# EAGLE board routetest3 (EAGLE 6.0)
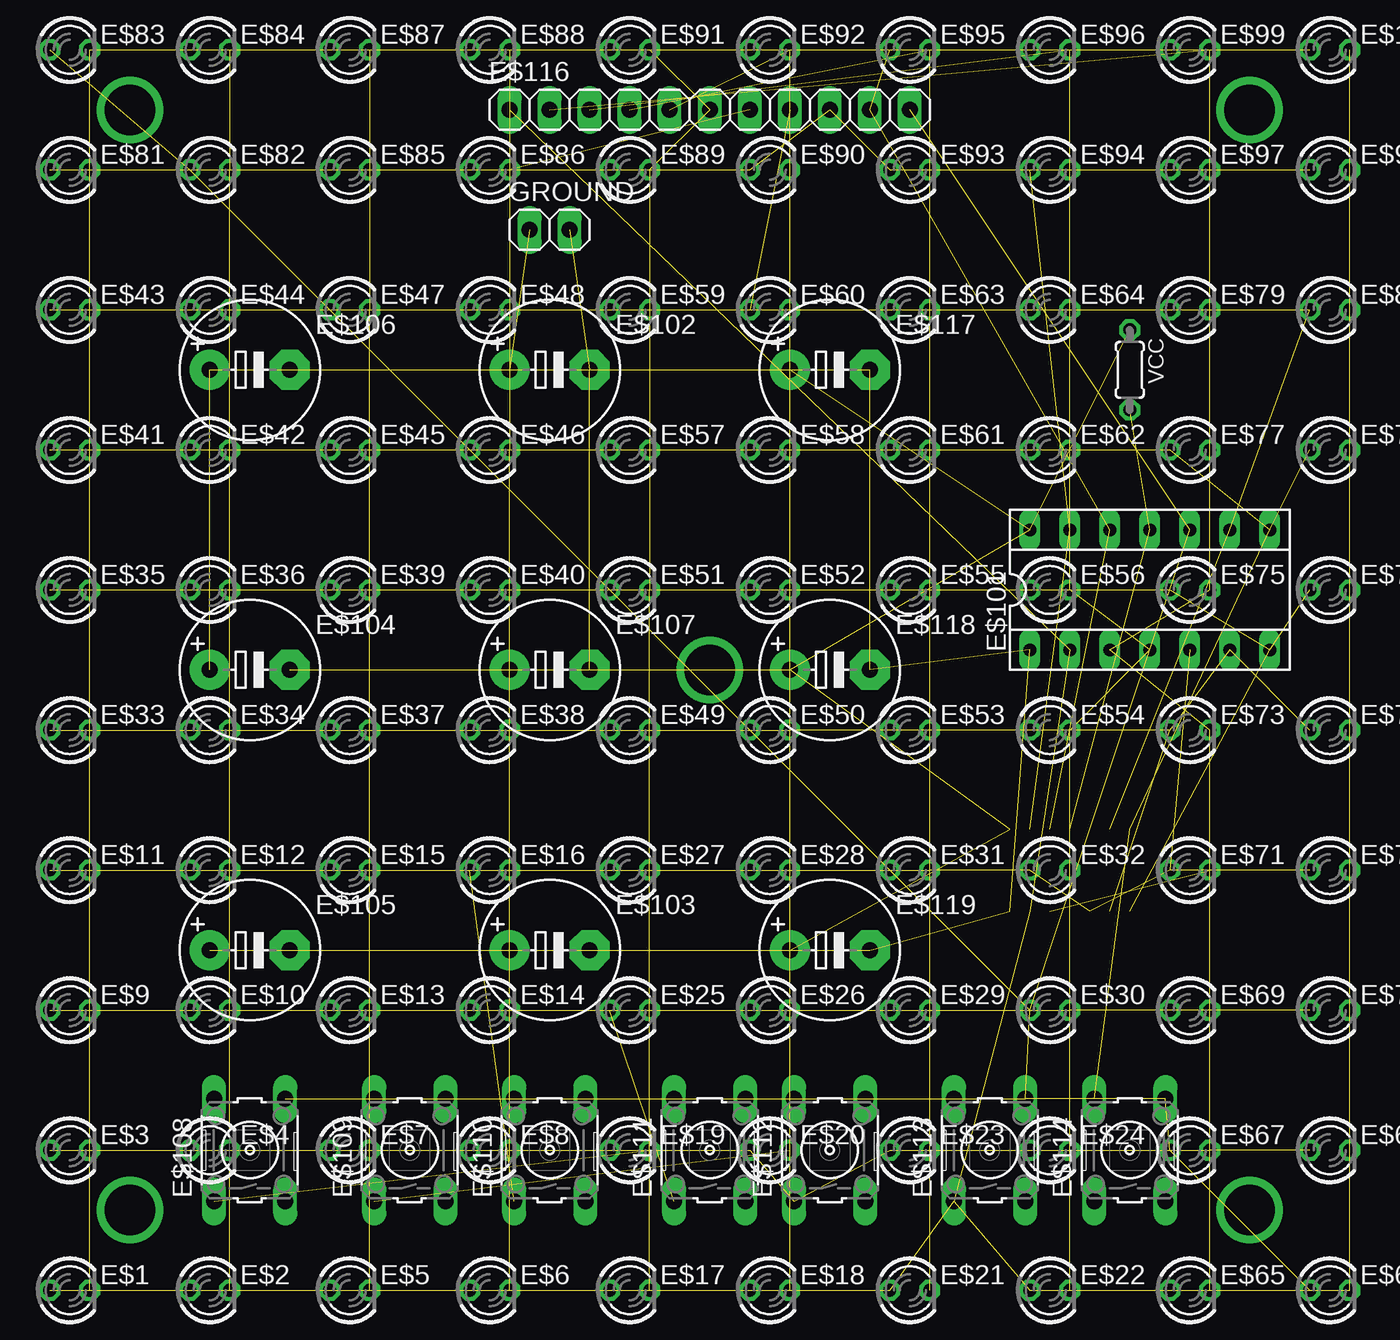
[diagram p0: board, top side]
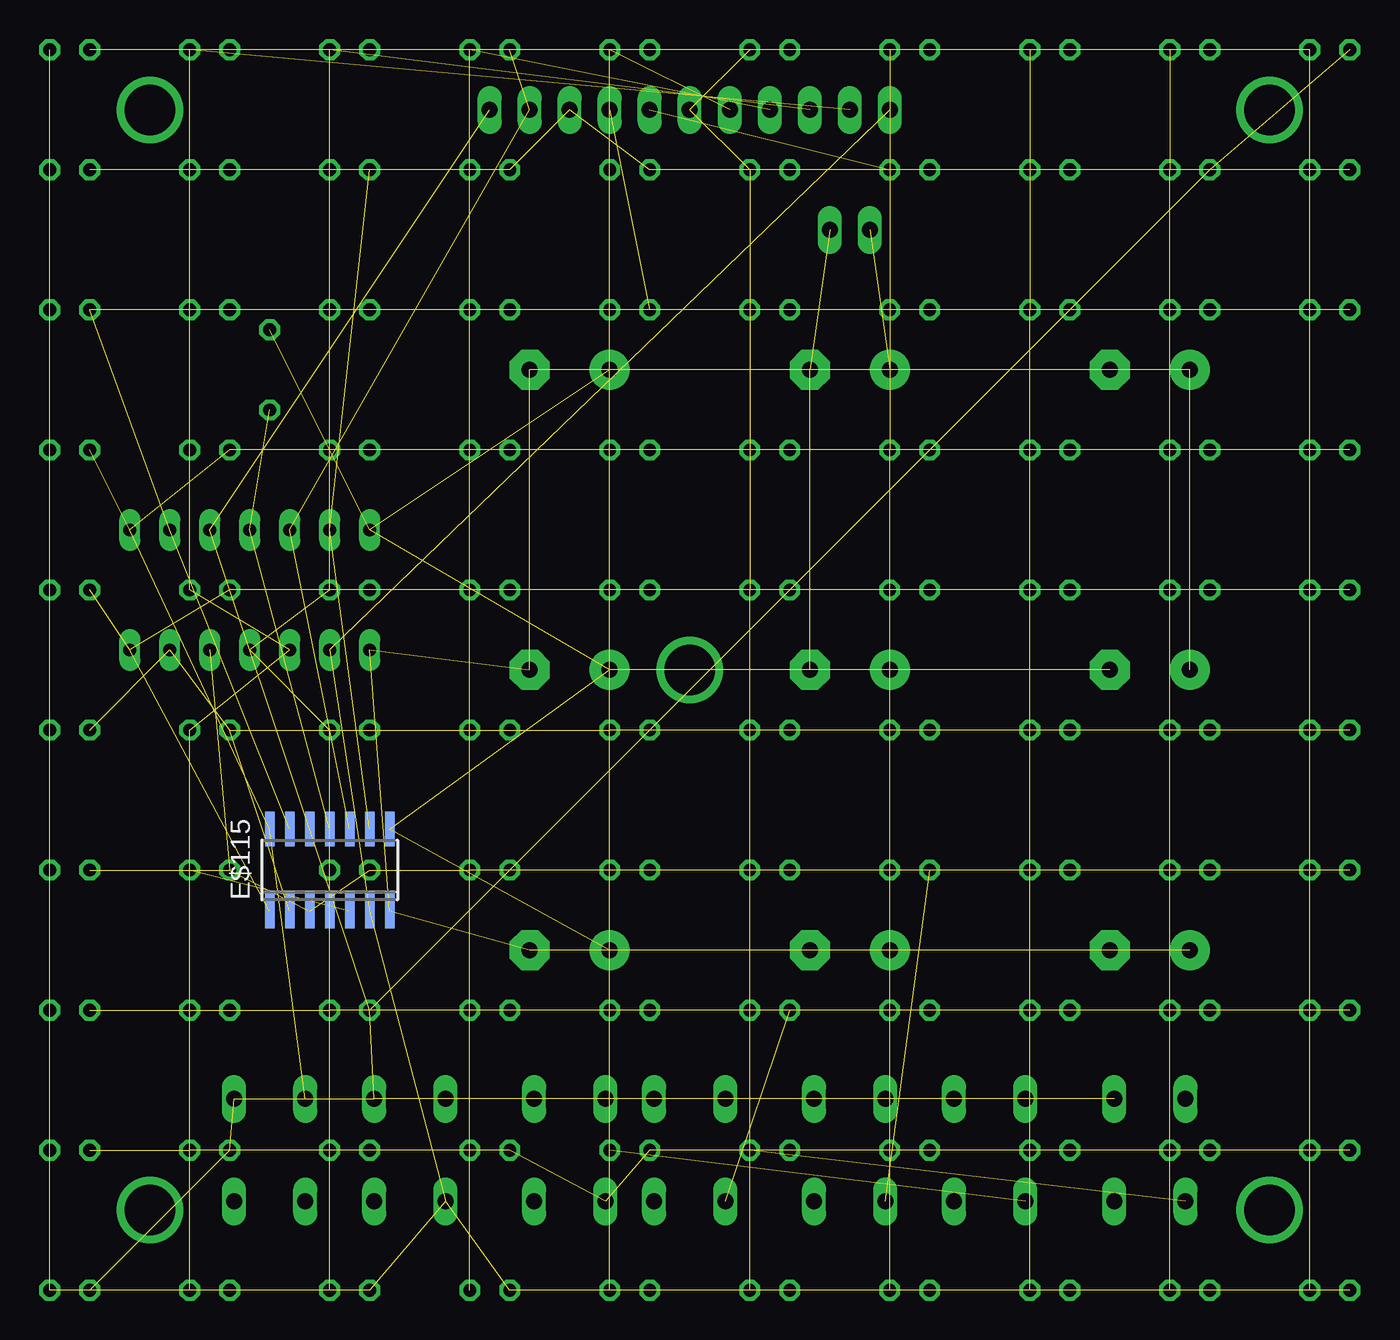
[diagram p1: board, bottom side, seen from below]

No outline drawn. Coordinates in mm, seen from the top.
Copper layers (1*16): Top 0.035mm / dielectric 1.5mm / Bottom 0.035mm
Design rules: minimum track width 20mil, minimum drill 24mil, track to track 15mil, track to pad 15mil, pad to pad 10mil, via to via 10mil, smd to smd 8mil, copper to edge 30mil, drill to drill 8mil, minimum pad ring 10mil, minimum via ring 8mil, stop-mask expansion 4mil, vias tented up to drill 0mil, thermal gap 10mil

## Footprints (pad centres in the part's own frame; a part is rotated, then mirrored left to right if it is on the bottom)
LED3MM = drill 0.813 octagon: A -1.27,0; K 1.27,0
SOCKET-14 = drill 0.813 long: 1 -7.62,-3.81; 2 -5.08,-3.81; 3 -2.54,-3.81; 4 0,-3.81; 5 2.54,-3.81; 6 5.08,-3.81; 7 7.62,-3.81; 8 7.62,3.81; 9 5.08,3.81; 10 2.54,3.81; 11 0,3.81; 12 -2.54,3.81; 13 -5.08,3.81; 14 -7.62,3.81
E5-8,5 = drill 1.016 pad 2.54: + -2.54,0 | drill 1.016 pad 2.54 octagon: - 2.54,0
B3F-10XX = drill 1.016 long: 1 -3.251,2.261; 2 3.251,2.261; 3 -3.251,-2.261; 4 3.251,-2.261
SO14 = smd 0.6 x 2.2: 1 -3.81,-2.6; 2 -2.54,-2.6; 3 -1.27,-2.6; 4 0,-2.6; 5 1.27,-2.6; 6 2.54,-2.6; 7 3.81,-2.6; 8 3.81,2.6; 9 2.54,2.6; 10 1.27,2.6; 11 0,2.6; 12 -1.27,2.6; 13 -2.54,2.6; 14 -3.81,2.6
1X11 = drill 1.016 long: 1 -12.7,0; 2 -10.16,0; 3 -7.62,0; 4 -5.08,0; 5 -2.54,0; 6 0,0; 7 2.54,0; 8 5.08,0; 9 7.62,0; 10 10.16,0; 11 12.7,0
1X02 = drill 1.016 long: 1 -1.27,0; 2 1.27,0
0204/5 = drill 0.813 octagon: 1 -2.54,0; 2 2.54,0

## Placement (x,y rotation side)
E$1  [LED3MM]  2.54,2.54 0 top
E$2  [LED3MM]  11.43,2.54 0 top
E$3  [LED3MM]  2.54,11.43 0 top
E$4  [LED3MM]  11.43,11.43 0 top
E$5  [LED3MM]  20.32,2.54 0 top
E$6  [LED3MM]  29.21,2.54 0 top
E$7  [LED3MM]  20.32,11.43 0 top
E$8  [LED3MM]  29.21,11.43 0 top
E$9  [LED3MM]  2.54,20.32 0 top
E$10  [LED3MM]  11.43,20.32 0 top
E$11  [LED3MM]  2.54,29.21 0 top
E$12  [LED3MM]  11.43,29.21 0 top
E$13  [LED3MM]  20.32,20.32 0 top
E$14  [LED3MM]  29.21,20.32 0 top
E$15  [LED3MM]  20.32,29.21 0 top
E$16  [LED3MM]  29.21,29.21 0 top
E$17  [LED3MM]  38.1,2.54 0 top
E$18  [LED3MM]  46.99,2.54 0 top
E$19  [LED3MM]  38.1,11.43 0 top
E$20  [LED3MM]  46.99,11.43 0 top
E$21  [LED3MM]  55.88,2.54 0 top
E$22  [LED3MM]  64.77,2.54 0 top
E$23  [LED3MM]  55.88,11.43 0 top
E$24  [LED3MM]  64.77,11.43 0 top
E$25  [LED3MM]  38.1,20.32 0 top
E$26  [LED3MM]  46.99,20.32 0 top
E$27  [LED3MM]  38.1,29.21 0 top
E$28  [LED3MM]  46.99,29.21 0 top
E$29  [LED3MM]  55.88,20.32 0 top
E$30  [LED3MM]  64.77,20.32 0 top
E$31  [LED3MM]  55.88,29.21 0 top
E$32  [LED3MM]  64.77,29.21 0 top
E$33  [LED3MM]  2.54,38.1 0 top
E$34  [LED3MM]  11.43,38.1 0 top
E$35  [LED3MM]  2.54,46.99 0 top
E$36  [LED3MM]  11.43,46.99 0 top
E$37  [LED3MM]  20.32,38.1 0 top
E$38  [LED3MM]  29.21,38.1 0 top
E$39  [LED3MM]  20.32,46.99 0 top
E$40  [LED3MM]  29.21,46.99 0 top
E$41  [LED3MM]  2.54,55.88 0 top
E$42  [LED3MM]  11.43,55.88 0 top
E$43  [LED3MM]  2.54,64.77 0 top
E$44  [LED3MM]  11.43,64.77 0 top
E$45  [LED3MM]  20.32,55.88 0 top
E$46  [LED3MM]  29.21,55.88 0 top
E$47  [LED3MM]  20.32,64.77 0 top
E$48  [LED3MM]  29.21,64.77 0 top
E$49  [LED3MM]  38.1,38.1 0 top
E$50  [LED3MM]  46.99,38.1 0 top
E$51  [LED3MM]  38.1,46.99 0 top
E$52  [LED3MM]  46.99,46.99 0 top
E$53  [LED3MM]  55.88,38.1 0 top
E$54  [LED3MM]  64.77,38.1 0 top
E$55  [LED3MM]  55.88,46.99 0 top
E$56  [LED3MM]  64.77,46.99 0 top
E$57  [LED3MM]  38.1,55.88 0 top
E$58  [LED3MM]  46.99,55.88 0 top
E$59  [LED3MM]  38.1,64.77 0 top
E$60  [LED3MM]  46.99,64.77 0 top
E$61  [LED3MM]  55.88,55.88 0 top
E$62  [LED3MM]  64.77,55.88 0 top
E$63  [LED3MM]  55.88,64.77 0 top
E$64  [LED3MM]  64.77,64.77 0 top
E$65  [LED3MM]  73.66,2.54 0 top
E$66  [LED3MM]  82.55,2.54 0 top
E$67  [LED3MM]  73.66,11.43 0 top
E$68  [LED3MM]  82.55,11.43 0 top
E$69  [LED3MM]  73.66,20.32 0 top
E$70  [LED3MM]  82.55,20.32 0 top
E$71  [LED3MM]  73.66,29.21 0 top
E$72  [LED3MM]  82.55,29.21 0 top
E$73  [LED3MM]  73.66,38.1 0 top
E$74  [LED3MM]  82.55,38.1 0 top
E$75  [LED3MM]  73.66,46.99 0 top
E$76  [LED3MM]  82.55,46.99 0 top
E$77  [LED3MM]  73.66,55.88 0 top
E$78  [LED3MM]  82.55,55.88 0 top
E$79  [LED3MM]  73.66,64.77 0 top
E$80  [LED3MM]  82.55,64.77 0 top
E$81  [LED3MM]  2.54,73.66 0 top
E$82  [LED3MM]  11.43,73.66 0 top
E$83  [LED3MM]  2.54,81.28 0 top
E$84  [LED3MM]  11.43,81.28 0 top
E$85  [LED3MM]  20.32,73.66 0 top
E$86  [LED3MM]  29.21,73.66 0 top
E$87  [LED3MM]  20.32,81.28 0 top
E$88  [LED3MM]  29.21,81.28 0 top
E$89  [LED3MM]  38.1,73.66 0 top
E$90  [LED3MM]  46.99,73.66 0 top
E$91  [LED3MM]  38.1,81.28 0 top
E$92  [LED3MM]  46.99,81.28 0 top
E$93  [LED3MM]  55.88,73.66 0 top
E$94  [LED3MM]  64.77,73.66 0 top
E$95  [LED3MM]  55.88,81.28 0 top
E$96  [LED3MM]  64.77,81.28 0 top
E$97  [LED3MM]  73.66,73.66 0 top
E$98  [LED3MM]  82.55,73.66 0 top
E$99  [LED3MM]  73.66,81.28 0 top
E$100  [LED3MM]  82.55,81.28 0 top
E$101  [SOCKET-14]  71.12,46.99 0 top
E$102  [E5-8,5]  33.02,60.96 0 top
E$103  [E5-8,5]  33.02,24.13 0 top
E$104  [E5-8,5]  13.97,41.91 0 top
E$105  [E5-8,5]  13.97,24.13 0 top
E$106  [E5-8,5]  13.97,60.96 0 top
E$107  [E5-8,5]  33.02,41.91 0 top
E$108  [B3F-10XX]  13.97,11.43 90 top
E$109  [B3F-10XX]  24.13,11.43 90 top
E$110  [B3F-10XX]  33.02,11.43 90 top
E$111  [B3F-10XX]  43.18,11.43 90 top
E$112  [B3F-10XX]  50.8,11.43 90 top
E$113  [B3F-10XX]  60.96,11.43 90 top
E$114  [B3F-10XX]  69.85,11.43 90 top
E$115  [SO14]  66.04,29.21 0 bottom
E$116  [1X11]  43.18,77.47 0 top
E$117  [E5-8,5]  50.8,60.96 0 top
E$118  [E5-8,5]  50.8,41.91 0 top
E$119  [E5-8,5]  50.8,24.13 0 top
GROUND  [1X02]  33.02,69.85 0 top
VCC  [0204/5]  69.85,60.96 270 top

## Library data of the parts
E$1-E$100 = led
E$101 = ic-package
E$102-E$107 E$117-E$119 VCC = rcl
E$108-E$114 = switch-omron
E$115 = analog-devices
E$116 GROUND = pinhead

## Nets
GROUND: E$101.1 E$102.- E$103.- E$104.- E$105.- E$106.- E$107.- E$115.7 E$117.- E$118.- E$119.- GROUND.2
S$1: E$30.A E$31.A E$46.A E$47.A E$50.A E$51.A E$66.A E$67.A E$82.A E$83.A E$101.10 E$108.4 E$109.4 E$110.4 E$111.4 E$112.4 E$113.4 E$114.4 E$115.12 E$116.11
S$2: E$1.K E$3.K E$9.K E$11.K E$33.K E$35.K E$41.K E$43.K E$81.K E$83.K E$84.A E$87.A E$88.A E$91.A E$92.A E$95.A E$96.A E$99.A E$100.A E$101.12 E$115.10 E$116.10
S$3: E$2.K E$4.K E$10.K E$12.K E$34.K E$36.K E$42.K E$44.K E$81.A E$82.K E$84.K E$85.A E$86.A E$89.A E$90.A E$93.A E$94.A E$97.A E$98.A E$101.13 E$115.9 E$116.9
S$4: E$5.K E$7.K E$13.K E$15.K E$37.K E$39.K E$43.A E$44.A E$45.K E$47.K E$48.A E$59.A E$60.A E$63.A E$64.A E$79.A E$80.A E$85.K E$87.K E$101.9 E$115.13 E$116.8
S$5: E$6.K E$8.K E$14.K E$16.K E$38.K E$40.K E$41.A E$42.A E$45.A E$46.K E$48.K E$57.A E$58.A E$61.A E$62.A E$77.A E$78.A E$86.K E$88.K E$101.8 E$114.2 E$115.14 E$116.7
S$6: E$17.K E$19.K E$25.K E$27.K E$35.A E$36.A E$39.A E$40.A E$49.K E$51.K E$52.A E$55.A E$56.A E$57.K E$59.K E$75.A E$76.A E$89.K E$91.K E$101.7 E$108.1 E$115.1 E$116.6
S$7: E$18.K E$20.K E$26.K E$28.K E$33.A E$34.A E$37.A E$38.A E$49.A E$50.K E$52.K E$53.A E$54.A E$58.K E$60.K E$73.A E$74.A E$90.K E$92.K E$101.6 E$109.1 E$115.2 E$116.5
S$8: E$11.A E$12.A E$15.A E$16.A E$21.K E$23.K E$27.A E$28.A E$29.K E$31.K E$32.A E$53.K E$55.K E$61.K E$63.K E$71.A E$72.A E$93.K E$95.K E$101.5 E$110.1 E$115.3 E$116.4
S$9: E$9.A E$10.A E$13.A E$14.A E$22.K E$24.K E$25.A E$26.A E$29.A E$30.K E$32.K E$54.K E$56.K E$62.K E$64.K E$69.A E$70.A E$94.K E$96.K E$101.4 E$111.1 E$115.4 E$116.3
S$13: E$3.A E$4.A E$7.A E$8.A E$19.A E$20.A E$23.A E$24.A E$65.K E$67.K E$68.A E$69.K E$71.K E$73.K E$75.K E$77.K E$79.K E$97.K E$99.K E$101.3 E$112.1 E$115.5 E$116.2
S$16: E$101.11 E$115.11 VCC.2
S$17: E$1.A E$2.A E$5.A E$6.A E$17.A E$18.A E$21.A E$22.A E$65.A E$66.K E$68.K E$70.K E$72.K E$74.K E$76.K E$78.K E$80.K E$98.K E$100.K E$101.2 E$113.1 E$115.6 E$116.1
VCC: E$101.14 E$102.+ E$103.+ E$104.+ E$105.+ E$106.+ E$107.+ E$115.8 E$117.+ E$118.+ E$119.+ GROUND.1 VCC.1

## Tracks (layer width: path | path; a pad name or v marks a point on that pad's centre or on a via)
GROUND  (11 unrouted)
S$1  (19 unrouted)
S$2  (21 unrouted)
S$3  (21 unrouted)
S$4  (21 unrouted)
S$5  (22 unrouted)
S$6  (22 unrouted)
S$7  (22 unrouted)
S$8  (22 unrouted)
S$9  (22 unrouted)
S$10  (via drill 3.2)
  other vias: 6.35,77.47 43.18,41.91
S$12  (via drill 3.2)
  other vias: 77.47,77.47
S$13  (22 unrouted)
S$14  (via drill 3.2)
  other vias: 77.47,7.62
S$15  (via drill 3.2)
  other vias: 6.35,7.62
S$16  (2 unrouted)
S$17  (22 unrouted)
VCC  (12 unrouted)